# EAGLE board f (EAGLE 9.6.2)
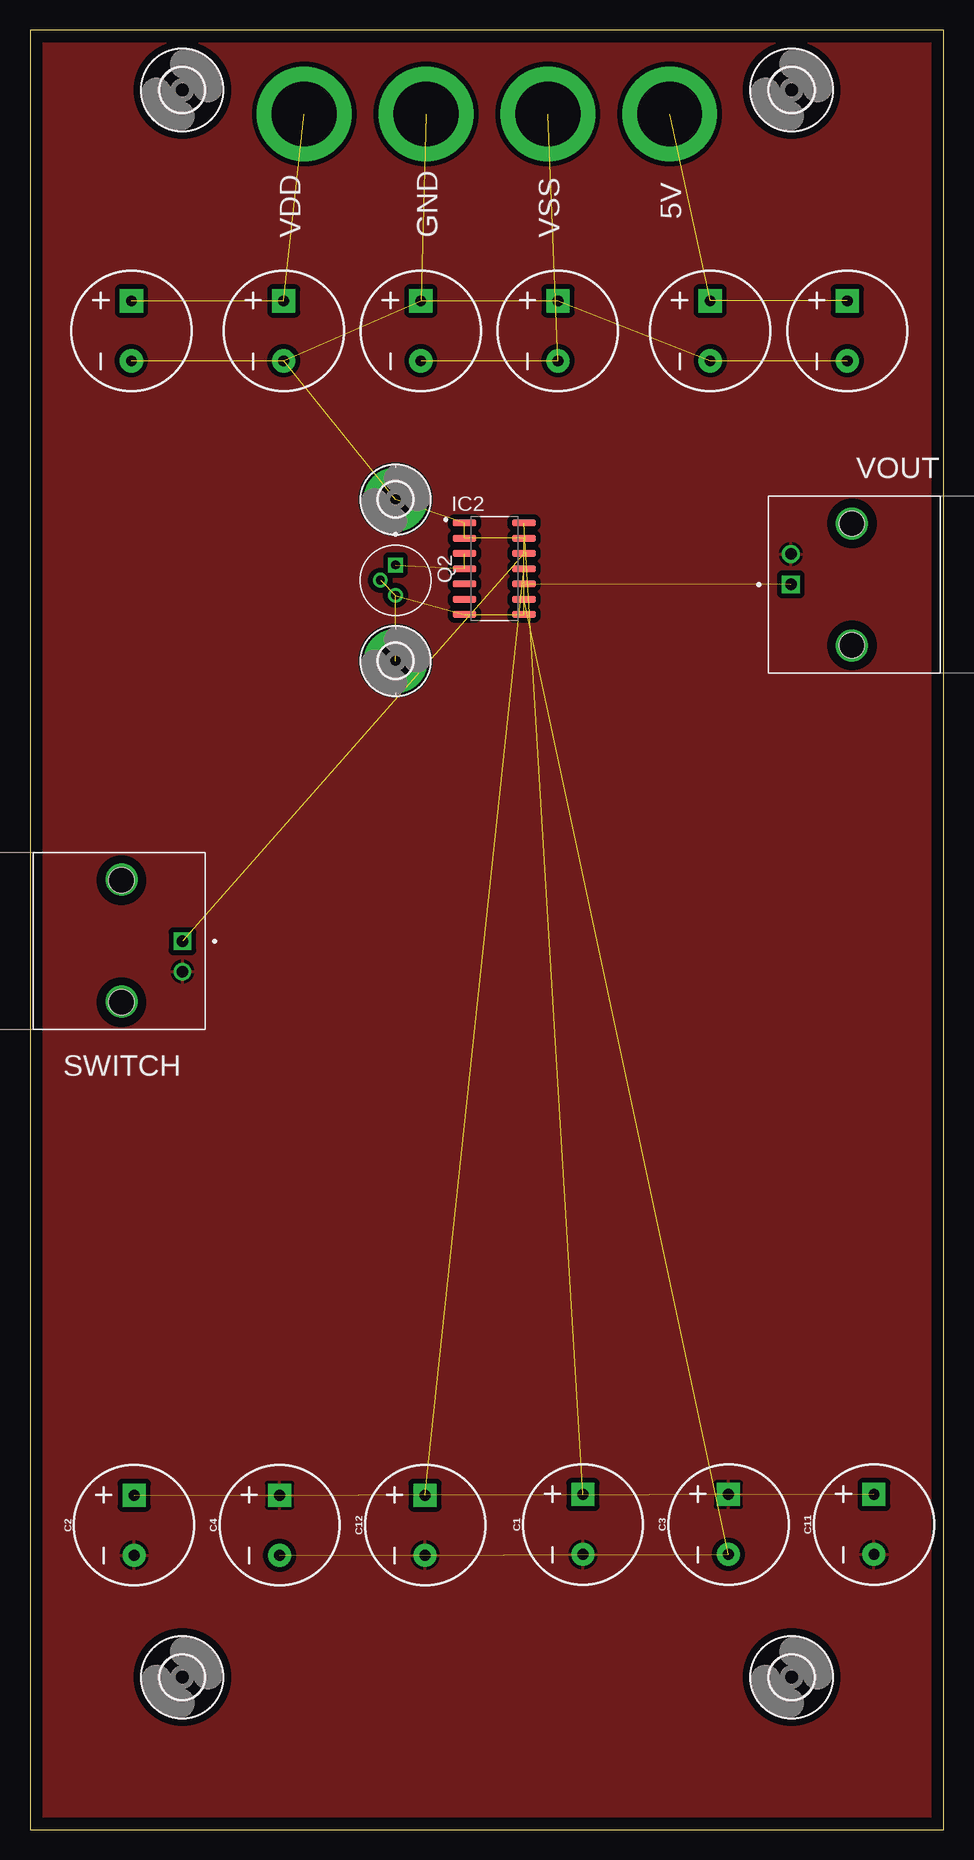
[diagram p0: board, top side]
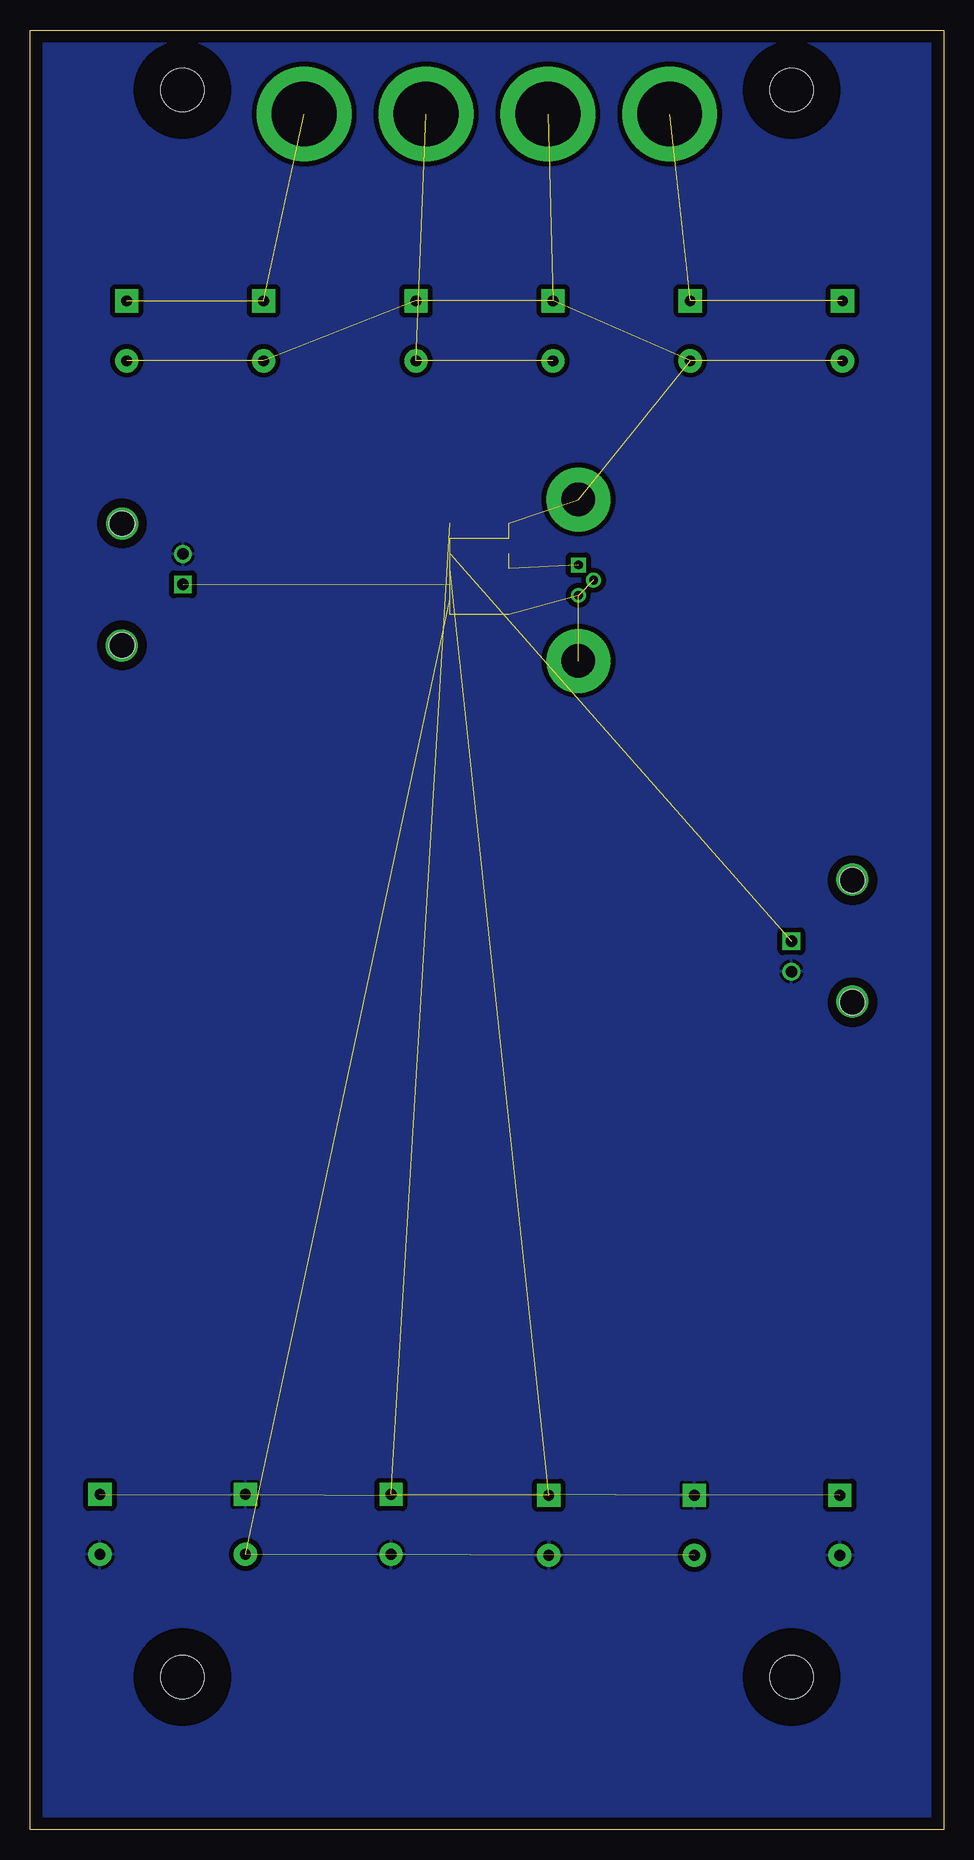
[diagram p1: board, bottom side, seen from below]

Size 76.2 x 150 mm. Coordinates in mm from the lower left corner, seen from the top.
Outline: 0,0 76.2,0 76.2,150 0,150 0,0
Copper layers (1*16): Top 0.035mm / dielectric 0.15mm / Bottom 0.035mm
Design rules "default *": minimum track width 6mil, minimum drill 0.35mm, track to track 16mil, track to pad 16mil, pad to pad 16mil, via to via 16mil, smd to smd 6mil, copper to edge 40mil, drill to drill 6mil, minimum pad ring 10mil, minimum via ring 8mil, stop-mask expansion 4mil, vias tented up to drill 0mil, thermal gap 10mil

## Footprints (pad centres in the part's own frame; a part is rotated, then mirrored left to right if it is on the bottom)
CPOL-RADIAL-5MM-10MM = drill 0.9 pad 1.93 square: + 2.5,0 | drill 0.9 pad 1.93: - -2.5,0
3,6 = hole 3.6: 0,0
2,8-PAD = drill 2.8 pad 5.334: B2,8 0,0
SOIC127P600X175-14N = smd 1.97 x 0.6: 1 -2.475,3.81; 2 -2.475,2.54; 3 -2.475,1.27; 4 -2.475,0; 5 -2.475,-1.27; 6 -2.475,-2.54; 7 -2.475,-3.81; 8 2.475,-3.81; 9 2.475,-2.54; 10 2.475,-1.27; 11 2.475,0; 12 2.475,1.27; 13 2.475,2.54; 14 2.475,3.81
TE_5227161-2 = drill 0.97: G -2.54,-5.08 | drill 0.97 square: S 0,-5.08 | hole 2.09: 5.08,0; -5.08,0
KEYSTONE_575-4 = drill 5.4 pad 7.9: 1 0,0
TO127P584H533-3 = drill 0.73 pad 1.13 square: 1 -1.27,0 | drill 0.73 pad 1.13: 2 0,-1.27; 3 1.27,0

## Placement (x,y rotation side)
C1  1mF  [CPOL-RADIAL-5MM-10MM]  46.1,25.43 90 top
C2  1mF  [CPOL-RADIAL-5MM-10MM]  8.68,25.37 90 top
C3  1mF  [CPOL-RADIAL-5MM-10MM]  58.24,25.43 90 top
C4  1mF  [CPOL-RADIAL-5MM-10MM]  20.81,25.37 90 top
C5  1mF  [CPOL-RADIAL-5MM-10MM]  21.15,124.92 90 top
C6  1mF  [CPOL-RADIAL-5MM-10MM]  8.45,124.92 90 top
C7  1mF  [CPOL-RADIAL-5MM-10MM]  32.58,124.92 90 top
C8  1mF  [CPOL-RADIAL-5MM-10MM]  44.01,124.92 90 top
C9  1mF  [CPOL-RADIAL-5MM-10MM]  56.71,124.92 90 top
C10  1mF  [CPOL-RADIAL-5MM-10MM]  68.14,124.92 90 top
C11  1mF  [CPOL-RADIAL-5MM-10MM]  70.37,25.43 90 top
C12  1mF  [CPOL-RADIAL-5MM-10MM]  32.94,25.37 90 top
H1  MOUNT-HOLE3.6  [3,6]  12.7,145 0 top
H2  MOUNT-HOLE3.6  [3,6]  63.5,145 0 top
H3  MOUNT-HOLE3.6  [3,6]  12.7,12.7 0 top
H4  MOUNT-HOLE3.6  [3,6]  63.5,12.7 0 top
H7  MOUNT-PAD-ROUND2.8  [2,8-PAD]  30.48,97.41 0 top
H8  MOUNT-PAD-ROUND2.8  [2,8-PAD]  30.48,110.87 0 top
IC2  IVC102U  [SOIC127P600X175-14N]  38.72,105.09 0 top
J3  5227161-2  [TE_5227161-2]  7.63,74.05 90 top
J4  575-4  [KEYSTONE_575-4]  22.86,143 0 top
J5  575-4  [KEYSTONE_575-4]  33.02,143 0 top
J6  575-4  [KEYSTONE_575-4]  43.18,143 0 top
J7  575-4  [KEYSTONE_575-4]  53.34,143 0 top
J8  5227161-2  [TE_5227161-2]  68.53,103.78 270 top
Q2  2N2222A  [TO127P584H533-3]  30.48,104.14 270 top

## Library data of the parts
C1-C12 = SparkFun-Capacitors; PROD_ID: CAP-09538
H1-H4 H7 H8 = holes
IC2 = IVC102U; AVAILABILITY: Good; DESCRIPTION: Precision Switched Integrator Transimpedance Amplifier 14-SOIC -40 to 125; MF: Texas; MP: IVC102U; PACKAGE: SO-14 Burr Brown; PRICE: None; PURCHASE-URL: https://pricing.snapeda.com/search/part/IVC102U/?ref=eda
J3 J8 = 5227161-2; COMMENT: 5227161-2; DESCRIPTION: Valox Black 50 Ohm Right Angle Jack PCB Mount BNC Connector; DIGI-KEY_PART_NUMBER: A32245-ND; EU_ROHS_COMPLIANCE: Compliant with Exemptions; MF: TE Connectivity; MP: 5227161-2; NUMBER_OF_POSITIONS: 1; PACKAGE: SMD-6 Omron Electronics; PURCHASE-URL: https://pricing.snapeda.com/search/part/5227161-2/?ref=eda
J4-J7 = 575-4; DESCRIPTION: Banana Jack- Non-Insulated .218 Length; DIGI-KEY_PART_NUMBER: 36-575-4-ND; MF: Keystone Electronics; MP: 575-4; PACKAGE: None; PURCHASE-URL: https://pricing.snapeda.com/search/part/575-4/?ref=eda
Q2 = 2N2222A; AVAILABILITY: Good; DESCRIPTION: Bipolar (BJT) Transistor NPN 50V 800mA 500mW Through Hole TO-18; MF: ON Semiconductor; MP: 2N2222A; PACKAGE: TO-18 Microsemi; PRICE: None; PURCHASE-URL: https://pricing.snapeda.com/search/part/2N2222A/?ref=eda

## Nets
5V: C11.+ C12.+ IC2.11
CATHODE1: IC2.3 IC2.4 Q2.1
GND: C1.- C2.- C3.+ C4.+ C11.- C12.- J3.G J8.G
S$1: C5.- C6.- C7.+ C8.+ C9.- C10.- H7.B2,8 H8.B2,8 IC2.1 IC2.2 IC2.7 IC2.8 IC2.13 J5.1 Q2.2 Q2.3
S$4: C5.+ C6.+ J4.1
S$5: C7.- C8.- J6.1
S$7: C9.+ C10.+ J7.1
SWITCH: IC2.12 J3.S
VDD: C1.+ C2.+ IC2.14
VOUT1: IC2.10 J8.S
VSS: C3.- C4.- IC2.9

## Tracks (layer width: path | path; a pad name or v marks a point on that pad's centre or on a via)
5V  (2 unrouted)
CATHODE1  (2 unrouted)
GND
  pour Top: 0,150 0,0 76.2,0 76.2,150
  pour Bottom: 0,150 0,0 76.2,0 76.2,150
N$2  (via drill 1.78)
  other vias: 7.65,69.02
N$3  (via drill 1.78)
  other vias: 7.65,79.18
N$4  (via drill 1.78)
  other vias: 68.53,108.87
N$5  (via drill 1.78)
  other vias: 68.54,98.71
S$1  (15 unrouted)
S$4  (2 unrouted)
S$5  (2 unrouted)
S$7  (2 unrouted)
SWITCH  (1 unrouted)
VDD  (2 unrouted)
VOUT1  (1 unrouted)
VSS  (2 unrouted)

## Text on the board
tNames: 5V | VDD | GND | VSS | VOUT | SWITCH | 4 Channel Low Noise IVC102 Switched Integrator | Alex Sludds (asludds@mit.edu) | Quantum Photonics Group